# Altium PCB Modulator.PcbDoc (part 1 of 3)
Units mm, origin at the board's own origin, x right, y up, seen from the top; angles counter-clockwise.
Board outline 162.1 x 100.1 mm, 4 copper layers (L1, P2, P5, L6), stack 1.501 mm thick; 138 components, 105 nets, 515 pads, 355 vias.
Unrouted connection lines stored in the file: 38.
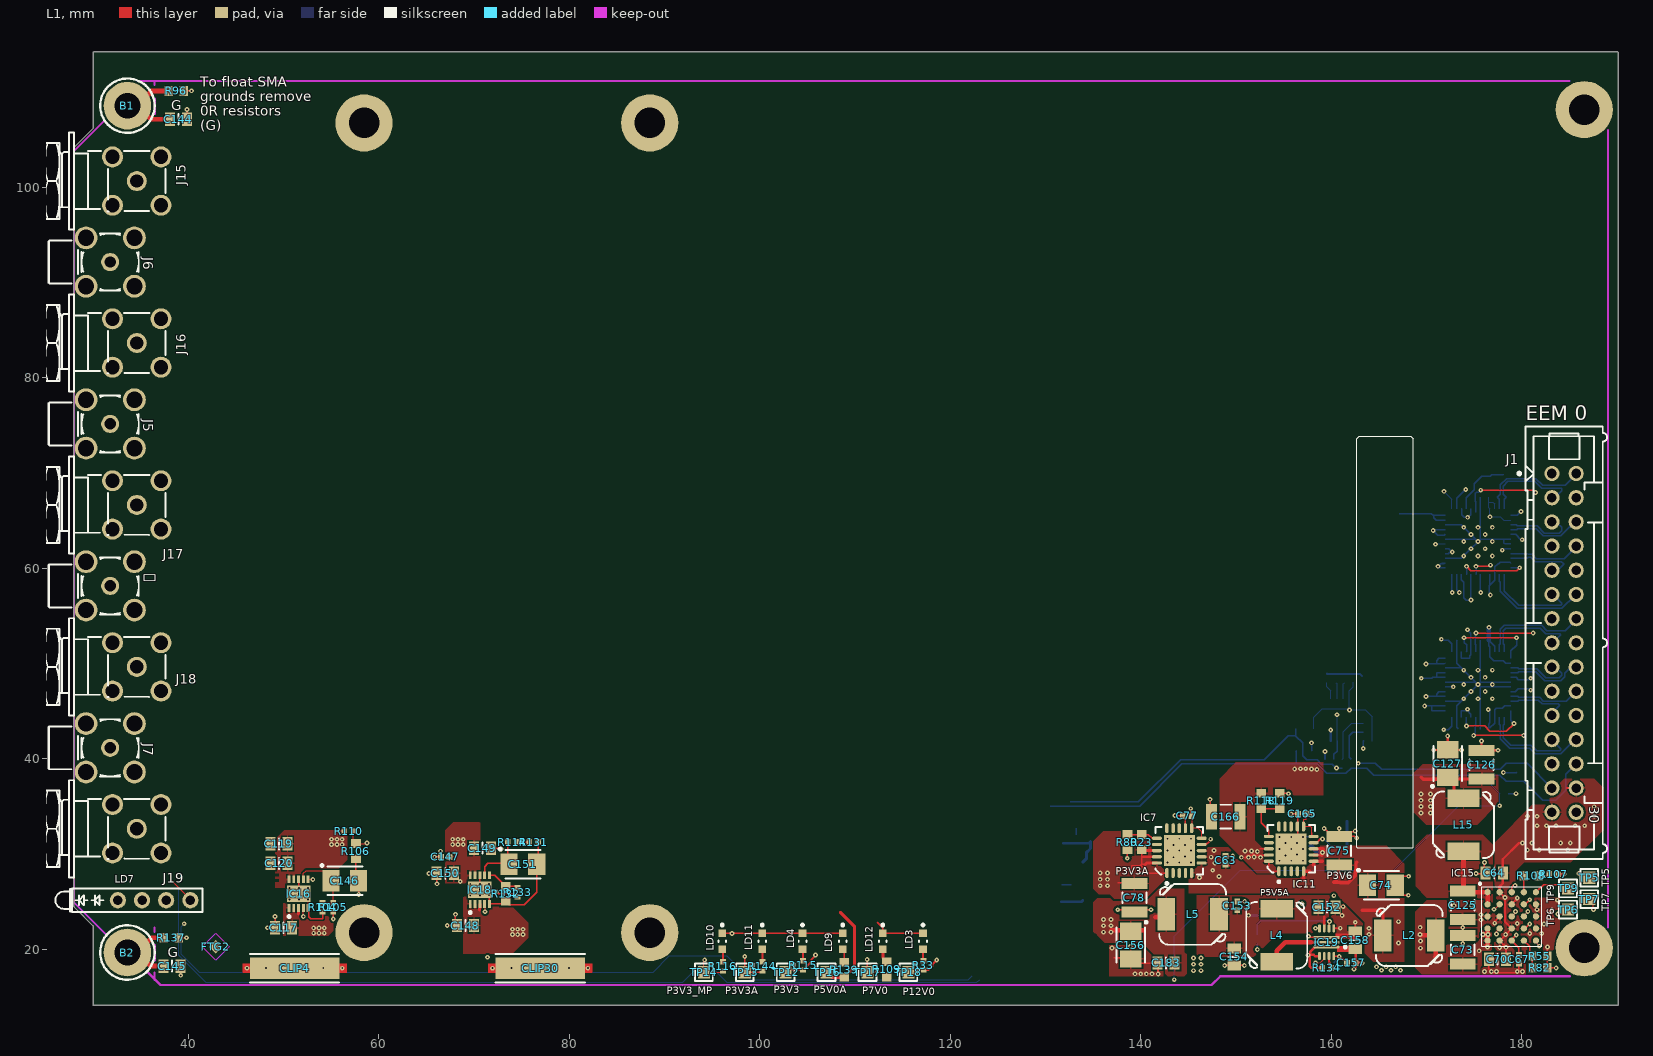
[diagram p0: L1 view]
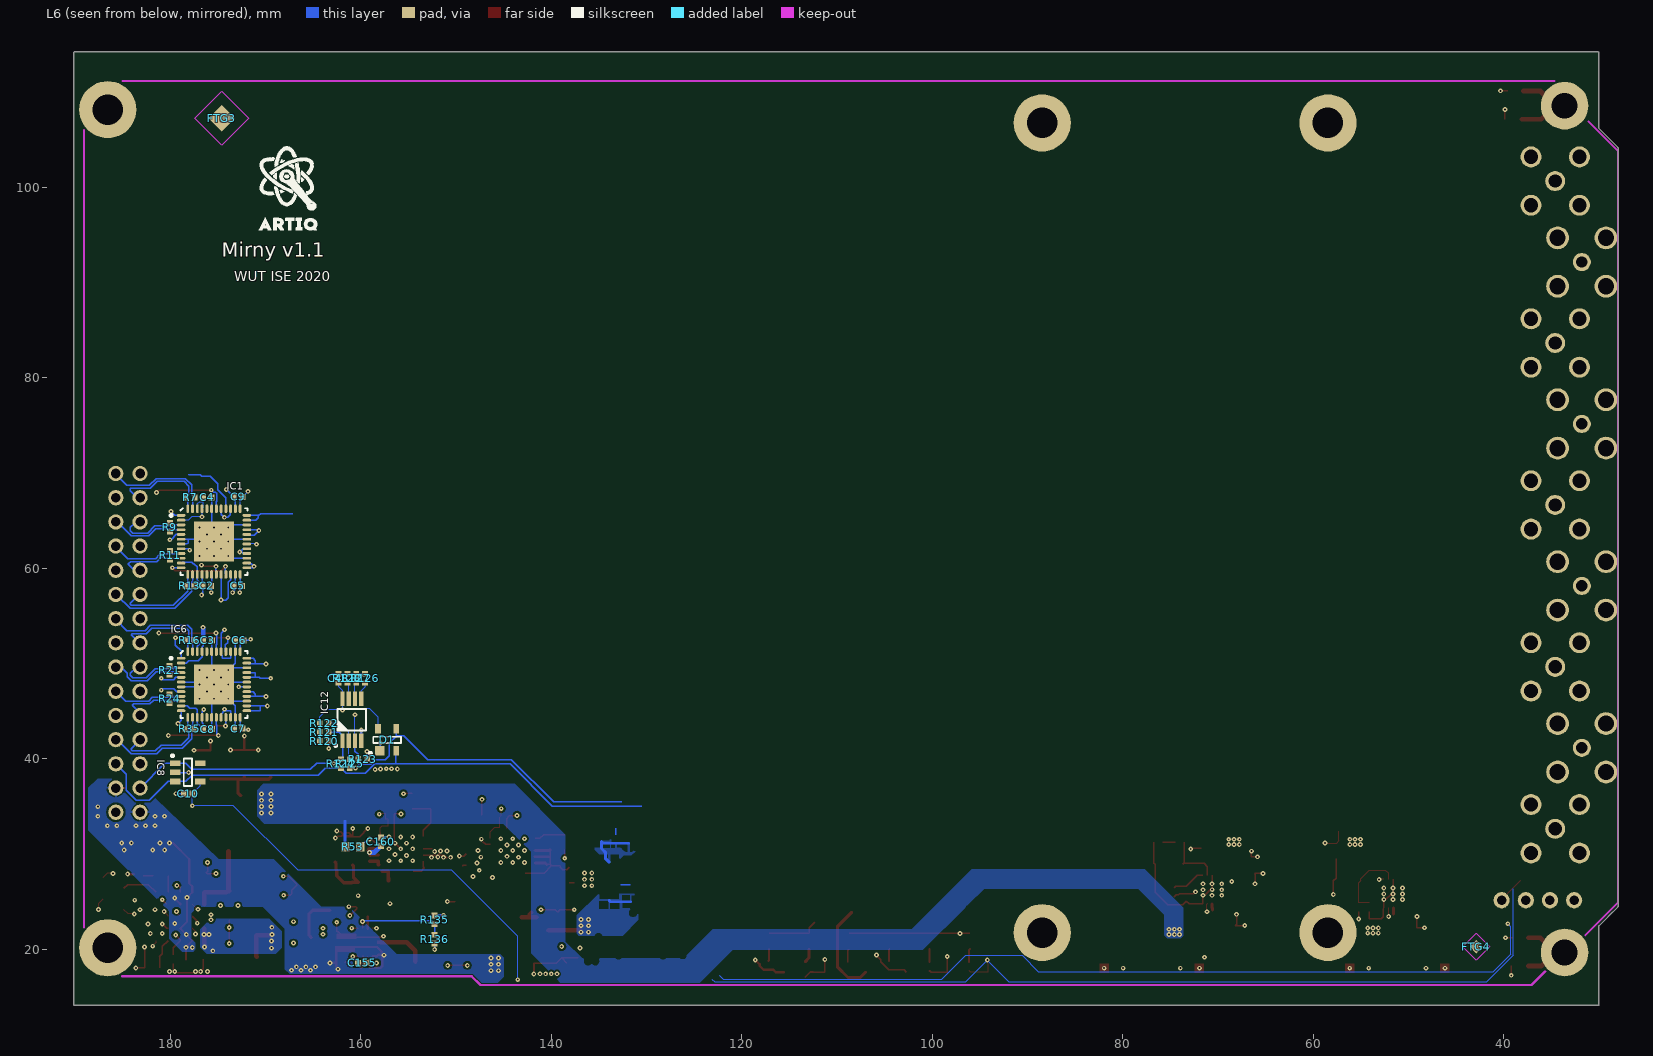
[diagram p1: L6 view, seen from below]
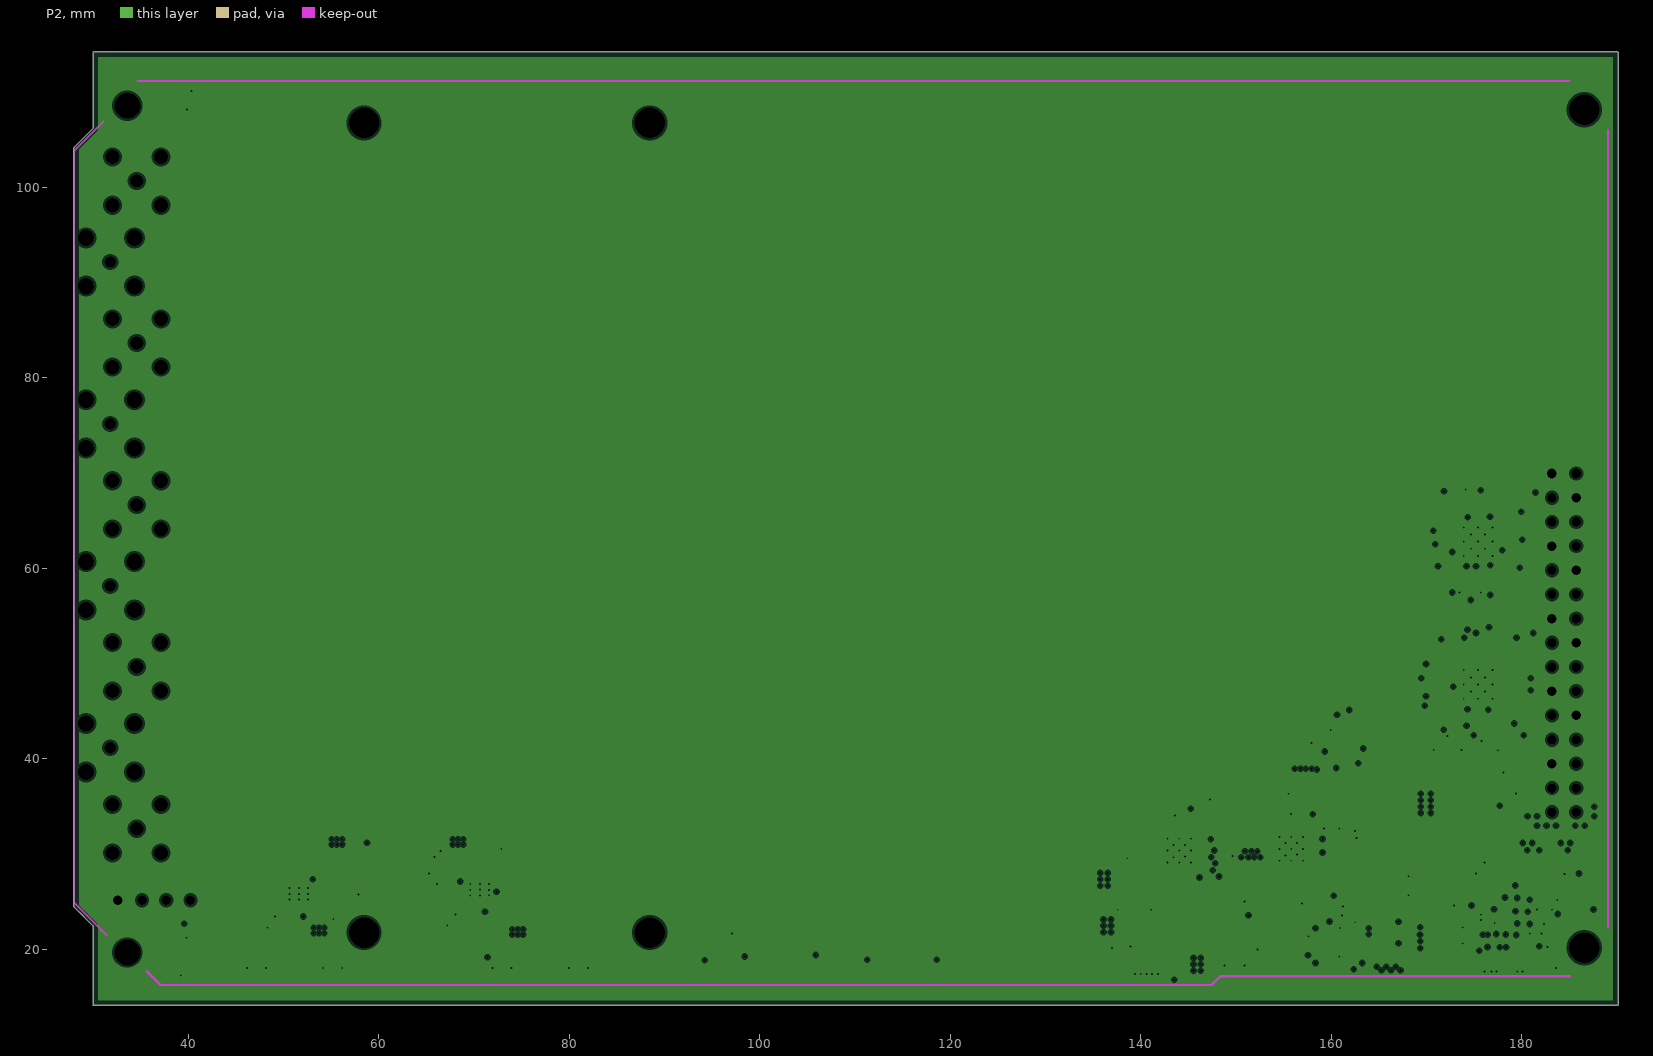
[diagram p2: P2, clearances drawn from the general rule]
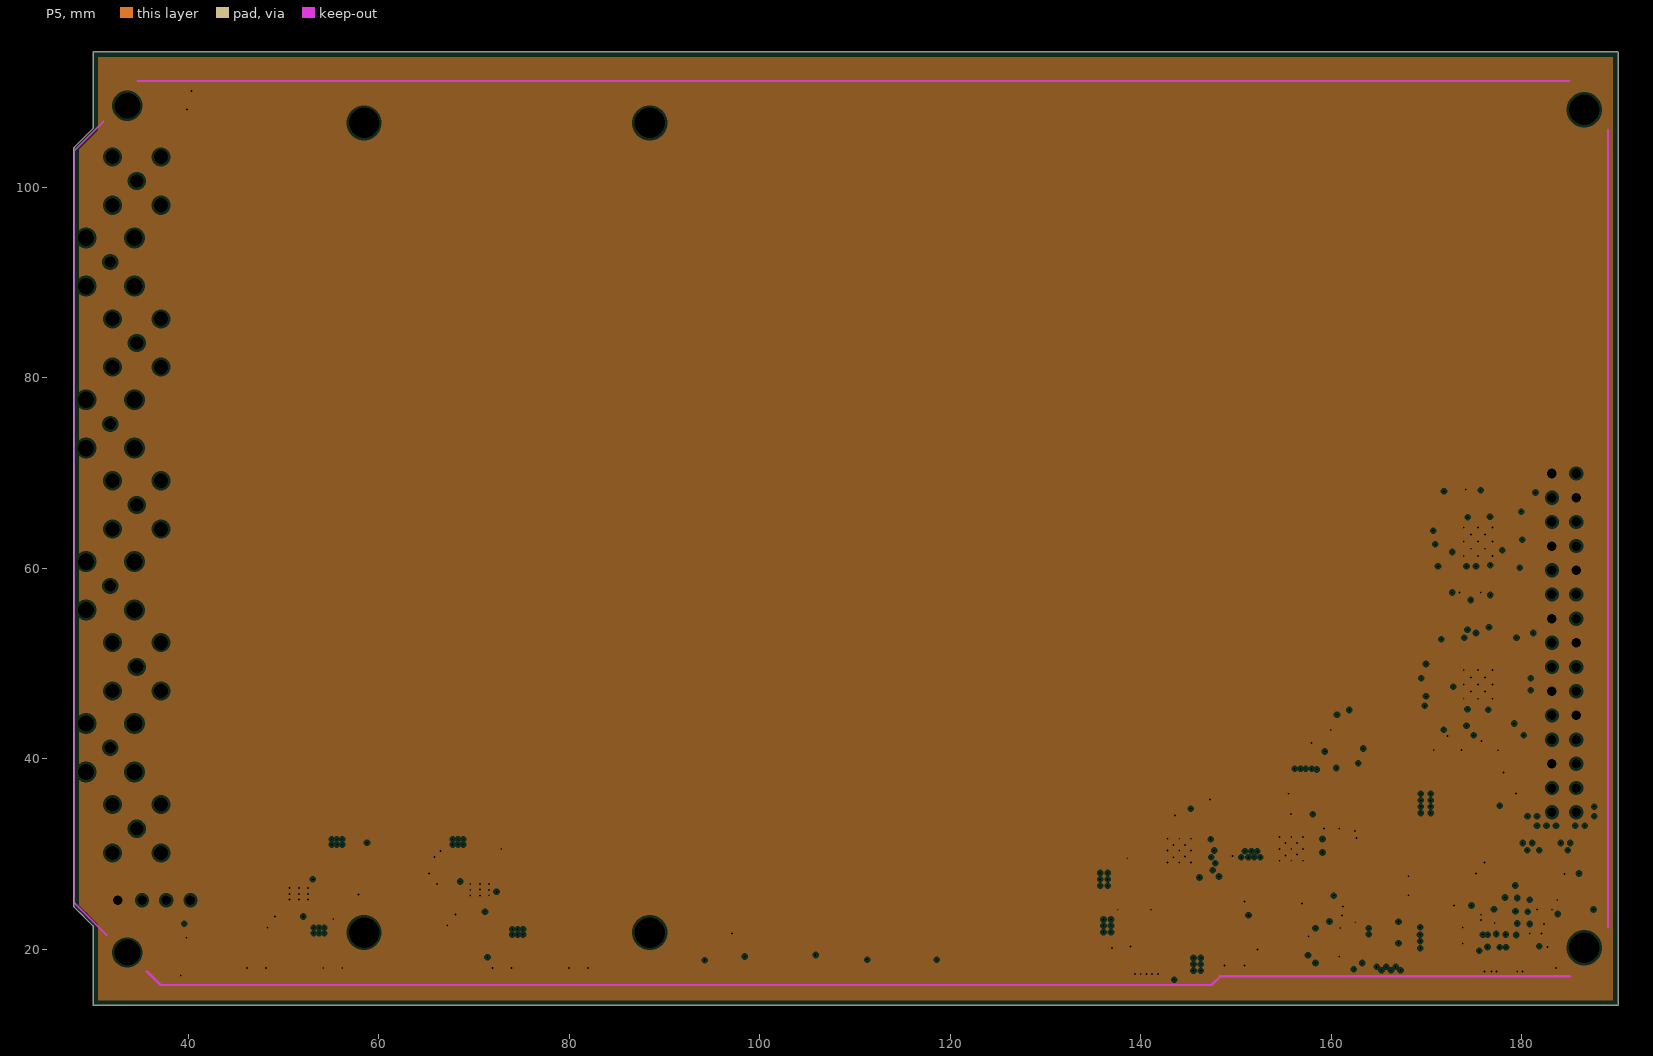
[diagram p3: P5, clearances drawn from the general rule]
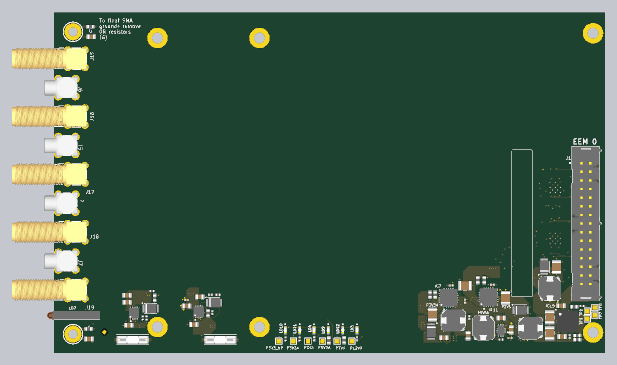
[diagram p5: 3D render of the assembled board from above, using the file's embedded part models]
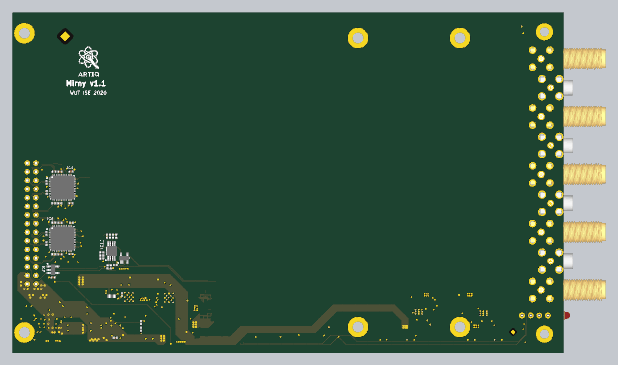
[diagram p6: 3D render of the assembled board from below, using the file's embedded part models]

## Layer stack, top to bottom
Top Solder: solder mask 0.034, Solder Resist, Dk 3.5
L1: signal copper 0.035
Dielectric1: prepreg 0.1803, PP-021, Dk 4.7
P2: plane copper 0.035, net GND
Dielectric 4: prepreg 1, FR4, Dk 4.1
P5: plane copper 0.035, net GND
Dielectric 3: prepreg 0.1803, PP-021, Dk 4.7
L6: signal copper 0.035
Bottom Solder: solder mask 0.034, Solder Resist, Dk 3.5

## Board outline
28.013,24.419 cw(c28.048,24.455) 27.998,24.455 27.998,97.16 27.998,104.135 cw(c28.048,104.135) 28.013,104.171 28.012,104.171 29.998,106.156 29.998,114.135 cw(c30.048,114.135) 30.048,114.186 190.043,114.186 cw(c190.043,114.135) 190.093,114.135 190.093,14.135 cw(c190.043,14.135) 190.043,14.085 30.048,14.085 cw(c30.048,14.135) 29.998,14.135 29.998,22.434 28.012,24.42 29.012,23.42 ccw(c29.048,23.455)

## Design rules (kind name [scope] priority, off if disabled: settings)
AcuteAngle AcuteAngle_GND [InNet('GND')] p1: minimum=5.00000000000000E+0001 checktracksonly=FALSE
AcuteAngle [All] p2: minimum=5.00000000000000E+0001 checktracksonly=FALSE
Clearance Clearance_balance [InNamedPolygon('balancing')            or InNamedPolygon('balancing_top')] p1: gap=0.3 ignorepadtopadclearanceinfootprint=FALSE
Clearance Clearance_1 [InPolygon vs (InDifferentialPairClass('All Differential Pairs'))] p2: gap=0.254 ignorepadtopadclearanceinfootprint=FALSE except(0: Arc-Hole Track-Hole SMDPad-Hole THPad-Hole Via-Hole Fill-Hole Poly-Hole Region-Hole Text-Hole; 0.508: Track-Poly)
Clearance Clearance_KeepOut [OnLayer('Keep-Out Layer') vs NOT ( InComponent('J8') OR InComponent('J11') OR InComponent('J2') OR InComponent('J3') OR InComponent('J4') OR InComponent('J5') OR InComponent('J6') )] p3: gap=0.1 ignorepadtopadclearanceinfootprint=FALSE except(0: Arc-Hole Track-Hole SMDPad-Hole THPad-Hole Via-Hole Fill-Hole Poly-Hole Region-Hole Text-Hole)
Clearance Clearance_50_Ohms_GND_VIA [InNetClass('50_Ohms') vs (IsVia AND InNet('GND')) and not(IsPad)] p4: gap=0.2 ignorepadtopadclearanceinfootprint=FALSE except(0: Arc-Hole Track-Hole SMDPad-Hole THPad-Hole Via-Hole Fill-Hole Poly-Hole Region-Hole Text-Hole)
Clearance Clearance_50_Ohms_GND_Plane [InNetClass('50_Ohms') vs InPolygon] p5: gap=0.5 ignorepadtopadclearanceinfootprint=FALSE except(0: Arc-Hole Track-Hole SMDPad-Hole THPad-Hole Via-Hole Fill-Hole Poly-Hole Region-Hole Text-Hole)
Clearance Clearance_50_Ohms_GND_PADS [InNetClass('50_Ohms') vs InNet('GND')] p6: gap=0.2 ignorepadtopadclearanceinfootprint=FALSE except(0: Arc-Hole Track-Hole SMDPad-Hole THPad-Hole Via-Hole Fill-Hole Poly-Hole Region-Hole Text-Hole)
Clearance Clearance_50_Ohms [InNetClass('50_Ohms')] p7: gap=0.2 ignorepadtopadclearanceinfootprint=FALSE except(0: Arc-Hole Track-Hole SMDPad-Hole THPad-Hole Via-Hole Fill-Hole Poly-Hole Region-Hole Text-Hole)
Clearance Clearance_DiffPair_1 [(InDifferentialPairClass('All Differential Pairs')) vs (InDifferentialPairClass('All Differential Pairs'))] p8 off: gap=0.3 ignorepadtopadclearanceinfootprint=FALSE except(0: Arc-Hole Track-Hole SMDPad-Hole THPad-Hole Via-Hole Fill-Hole Poly-Hole Region-Hole Text-Hole)
Clearance Clearance_Fiducials [InComponentClass('Fiducials')] p9: gap=0 ignorepadtopadclearanceinfootprint=TRUE
Clearance Clearance_SMA [InComponentClass('SMAs') or InComponentClass('FP_LEDs')] p10: gap=0 ignorepadtopadclearanceinfootprint=TRUE
Clearance [Not (OnLayer('Keep-Out Layer'))] p11: gap=0.127 ignorepadtopadclearanceinfootprint=FALSE except(0: Arc-Hole Track-Hole SMDPad-Hole THPad-Hole Via-Hole Fill-Hole Poly-Hole Region-Hole Text-Hole; 0.203: Arc-Poly Track-Poly SMDPad-Poly THPad-Poly Via-Poly Fill-Poly Poly-Poly)
Clearance Clearance_abs [All] p12: gap=0.1 ignorepadtopadclearanceinfootprint=FALSE except(0: Arc-Hole Track-Hole SMDPad-Hole THPad-Hole Via-Hole Fill-Hole Poly-Hole Region-Hole Text-Hole)
ComponentClearance Clearance_TestPoint [(HasFootprint('TPS127'))] p1: gap=0 collisioncheckmode=3 verticalgap=0 showdistances=FALSE
ComponentClearance Clearance_FrontPanel [InComponentClass('Front Panel')] p2: gap=0 collisioncheckmode=3 verticalgap=0 showdistances=FALSE
ComponentClearance Clearance_ERNI [(HasFootprint('ERMET ZD 3-10 CONNECTOR')) vs (HasFootprint('ERMET ZD 3-10 CONNECTOR'))] p3: gap=0 collisioncheckmode=3 verticalgap=0.254 showdistances=FALSE
ComponentClearance Clearance_Radiall_Placement [HasFootprint('Coaxipack2') vs HasFootprint('Coaxipack2')] p4: gap=0 collisioncheckmode=3 verticalgap=0.254 showdistances=FALSE
ComponentClearance [All] p5: gap=0.254 collisioncheckmode=3 verticalgap=0.254 showdistances=FALSE
DiffPairsRouting CLK_DiffPairsRouting [(InDifferentialPairClass('All Differential Pairs'))] p1: maxlimit=0.178 minlimit=0.127 mostfreqgap=0.152 toplayer_minwidth=0.152 toplayer_maxwidth=0.152 toplayer_prefwidth=0.152 bottomlayer_minwidth=0.152 bottomlayer_maxwidth=0.152 bottomlayer_prefwidth=0.152 impedanceprofiledriven=TRUE impedanceprofileid={C5AA11C3-B91C-49ED-8D09-5B71503F6C61} impedanceprofilevalue=100.000000 maxuncoupledlength=10
FabricationTestPointUsage TestPointUsage [All] p1: valid=0 allowmultiple=FALSE
FabricationTestpoint Testpoint [(IsPad And (OnTopLayer Or OnBottomLayer))] p1: side=3 testpointundercomponent=TRUE minsize=1.016 maxsize=2.54 preferedsize=1.524 minholesize=0 maxholesize=1.016 preferedholesize=0.813 testpointgrid=0.025 allowsidetop=TRUE allowsidebottom=TRUE usegrid=TRUE gridtolerance=0
Height BottomHeight [All] p1: minheight=0 maxheight=20 prefheight=10
Height TopHeight [OnLayer('Top Layer (LO)')] p2: minheight=0 maxheight=2.5 prefheight=1
HoleSize [All] p1: absolutevalues=TRUE maxlimit=5 minlimit=0.2 maxpercent=80.000 minpercent=20.000
HoleToHoleClearance [All] p1: gap=0.2 allowstackedmicrovias=TRUE
MatchedLengths "CLK IC13" [InDifferentialPairClass('CLK_IC13')] p1: tolerance=1.27 checknetsindiffpair=FALSE checkdiffpairvsdiffpair=TRUE checkxsignals=TRUE checkothers=TRUE
MinimumAnnularRing MinimumAnnularRing_Blind [(InNetClass('50_Ohms') OR InDifferentialPairClass('All Differential Pairs'))] p1: minimumring=0.1
MinimumAnnularRing [All] p2: minimumring=0.15
MinimumSolderMaskSliver [All] p1: minsoldermaskwidth=0.2
PlaneClearance [All] p1: clearance=0.25
PlaneConnect PlaneConnect_pad [InPadClass('All Pads')] p1: planeconnectstyle=Relief reliefexpansion=0.508 reliefentries=4 reliefconductorwidth=0.254 reliefairgap=0.254
PlaneConnect [All] p2: planeconnectstyle=Direct reliefexpansion=0.508 reliefentries=4 reliefconductorwidth=0.254 reliefairgap=0.254
PolygonConnect PolygonConnect_pad [IsPad] p1: connectstyle=Relief reliefconductorwidth=0.2 reliefentries=4 polygonreliefangle="90 Angle" airgapwidth=0.152
PolygonConnect [All] p2: connectstyle=Direct reliefconductorwidth=0.254 reliefentries=4 polygonreliefangle="90 Angle" airgapwidth=0.254
RoomDefinition Modulator [InComponentClass('Modulator')] p1: confinementstyle=ConfineIn formatcopy=TRUE lockcomponents=FALSE outline 0,0 50.8,0 50.8,25.4 0,25.4
RoomDefinition U_Supply_Modulator [InComponentClass('U_Supply_Modulator')] p2 off: confinementstyle=ConfineIn formatcopy=TRUE lockcomponents=FALSE outline 120.617,25.978 94.044,25.978 94.044,42.233 120.617,42.233
RoomDefinition U_LVDS_IFCA [InComponentClass('U_LVDS_IFCA')] p3 off: confinementstyle=ConfineIn formatcopy=TRUE lockcomponents=FALSE outline 164.78,23.94 189.048,23.94 189.048,76.181 164.78,76.181
RoutingVias [All] p1: holewidth=0.2 width=0.5 viastyle="Through Hole" minholewidth=0.2 minwidth=0.5 maxholewidth=0.5 maxwidth=1
SMDNeckDown [All] p1: percent=100.000
SMDToCorner [All] p1: distance=78740
SMDToPlane [All] p1: distance=0
SilkToSilkClearance [All] p1: silktosilkclearance=0
SilkToSolderMaskClearance SilkscreenOverComponentPads [IsPad] p1: minsilkscreentomaskgap=0.05 clearancetoexposedcopper=TRUE
SolderMaskExpansion SolderMaskExpansion_GND_VIA [IsVia AND InNet('GND')] p1: expansion=-0.1 istentingtop=FALSE
SolderMaskExpansion [All] p2: expansion=0.05 istentingtop=FALSE
Width 50_Ohm_Lines [InNetClass('50_Ohms')] p1: maxlimit=0.333 minlimit=0.24 preferedwidth=0.279 toplayer_prefwidth=0.278 bottomlayer_minwidth=0.279 impedanceprofiledriven=TRUE impedanceprofileid={03AB9ABB-85C4-48E2-9EB1-A1AAAEFC589C} impedanceprofilevalue=50.000000 minimp=45.000000 maximp=55.000000 favimp=50.000000
18 further rules are at their usual default settings.

## Classes and differential pairs
component class U_Supply_Modulator: C48 C63 C64 C67 C70 C73 C74 C75 C77 C78 C117 C119 C120 C125 C126 C127 C146 C147 C148 C149 C150 C151 C152 C153 C154 C155 C156 C157 C158 C160 C165 C166 C183 IC7 IC11 IC12 IC15 IC16 IC18 IC19 L2 L4 L5 L15 LD3 LD4 LD7 LD9 LD10 LD11 LD12 R23 R33 R53 R55 R80 R82 R104 R105 R106 R107 R108 R109 R110 R114 R115 R116 R118 R119 R120 R121 R122 R123 R124 R125 R126 R127 R128 R131 R132 R133 R134 R135 R136 R139 R144 TP5 TP6 TP7 TP9 TP12 TP13 TP14 TP16 TP17 TP18
component class U_LVDS_IFCA: C2 C3 C4 C5 C6 C7 C8 C9 C10 D1 IC1 IC6 IC8 J1 R7 R9 R11 R13 R16 R21 R24 R35
component class Modulator: B1 B2 C144 C145 CLIP4 CLIP30 FTG2 FTG3 FTG4 R96 R137
differential pair LVDS7: +LVDS7_P -LVDS7_N
differential pair LVDS6: +LVDS6_P -LVDS6_N
differential pair LVDS5: +LVDS5_P -LVDS5_N
differential pair LVDS4: +LVDS4_P -LVDS4_N
differential pair LVDS3: +LVDS3_P -LVDS3_N
differential pair LVDS2: +LVDS2_P -LVDS2_N
differential pair LVDS1: +LVDS1_P -LVDS1_N
differential pair LVDS0: +LVDS0_P -LVDS0_N

## Components (designator, comment, footprint, x,y, rotation, side; value= is the part's Value field where it differs from the comment)
 "MCX" AMPHENOL_919-383J-51A 31.798,58.135 r180 top (schematic designator J2)
B1 "Plated Hole" MTG270_500 33.604,108.547 r0 top
B2 "Plated Hole" MTG270_500 33.604,19.647 r0 top
C2 "100nF" CAPC1005X55N 176.148,58.135 r0 bottom
C3 "100nF" CAPC1005X55N 176.073,52.41 r0 bottom
C4 "100nF" CAPC1005X55N 176.098,67.435 r0 bottom
C5 "100nF" CAPC1005X55N 172.898,58.135 r180 bottom
C6 "100nF" CAPC1005X55N 172.748,52.41 r180 bottom
C7 "100nF" CAPC1005X55N 172.848,43.16 r180 bottom
C8 "100nF" CAPC1005X55N 176.073,43.11 r0 bottom
C9 "100nF" CAPC1005X55N 172.873,67.485 r180 bottom
C10 "100nF" CAPC1005X55N 178.105,36.322 r180 bottom
C48 "100nF" CAPC1005X55N 162.322,48.453 r270 bottom
C63 "1uF" CAPC1005X55N 148.907,29.327 r90 top
C64 "22uF" CAPC2012X135N 177.098,27.994 r0 top
C67 "100nF" CAPC1005X55N 179.688,18.938 r90 top
C70 "22uF" CAPC2012X135N 177.438,18.938 r0 top
C73 "47uF" CAPC3225X270N 173.79,19.924 r270 top
C74 "22uF" CAPMP3528X210N 165.259,26.694 r0 top
C75 "47uF" CAPC3225X270N 160.826,30.322 r270 top
C77 "1uF" CAPC1005X55N 144.848,33.983 r0 top
C78 "47uF" CAPC3225X270N 139.327,25.396 r90 top
C117 "22uF" CAPC2012X135N 50.007,22.25 r180 top
C119 "22uF" CAPC2012X135N 49.514,31.055 r180 top
C120 "22uF" CAPC2012X135N 49.525,29.008 r180 top
C125 "47uF" CAPC3225X270N 173.79,24.603 r90 top
C126 "47uF" CAPC3225X270N 175.768,39.357 r270 top
C127 "22uF" CAPMP3528X210N 172.212,39.482 r90 top
C144 "Undefined" CAPC2012X135N 38.967,107.119 r0 top
C145 "Undefined" CAPC2012X135N 38.302,18.219 r0 top
C146 "22uF" CAPMP3528X210N 56.434,27.181 r0 top
C147 "100nF" CAPC1005X55N 66.975,29.693 r0 top
C148 "22uF" CAPC2012X135N 69.09,22.479 r180 top
C149 "22uF" CAPC2012X135N 70.875,30.601 r0 top
C150 "22uF" CAPC2012X135N 66.975,27.953 r180 top
C151 "22uF" CAPMP3528X210N 75.129,28.908 r0 top
C152 "22uF" CAPC2012X135N 159.534,24.392 r180 top
C153 "100nF" CAPC1005X55N 150.121,24.558 r270 top
C154 "22uF" CAPC2012X135N 149.794,19.19 r90 top
C155 "100nF" CAPC1005X55N 159.819,18.574 r0 bottom
C156 "22uF" CAPMP3528X210N 138.955,20.422 r270 top
C157 "100nF" CAPC1005X55N 162.112,18.552 r0 top
C158 "22uF" CAPC2012X135N 162.5,20.933 r270 top
C160 "1uF" CAPC1005X55N 157.871,31.275 r90 bottom
C165 "1uF" CAPC1005X55N 156.938,34.188 r0 top
C166 "47uF" CAPC3225X270N 148.907,33.905 r0 top
C183 "22uF" CAPC2012X135N 142.653,18.552 r0 top
CLIP4 "S1411-46R" CLIP_HOLLAND-SHIELDING_LC 51.149,17.997 r180 top
CLIP30 "S1411-46R" CLIP_HOLLAND-SHIELDING_LC 76.93,17.997 r180 top
D1 "PRTR5V0U2X" SOT190P230X110-4N 157.226,41.974 r90 bottom
FTG2 "Use only in PCB" FIDUCIAL_TOP_S100-200 42.862,20.256 r180 top locked
FTG3 "Use only in PCB" FIDUCIAL_TOP_S200-400 174.577,107.221 r180 bottom locked
FTG4 "Use only in PCB" FIDUCIAL_TOP_S100-200 42.862,20.256 r90 bottom locked
IC1 "SN65MLVD040RGZT" QFN50P700X700X100-49N-S420 175.398,62.785 r180 bottom
IC6 "SN65MLVD040RGZT" QFN50P700X700X100-49N-S420 175.398,47.785 r180 bottom
IC7 "TPS74901RGWT" QFN65P500X500X100-21N-S325 144.035,30.342 r90 top
IC8 "24AA02E48T-I/OT" SOT95P280X145-5N 178.148,38.56 r180 bottom
IC11 "TPS74901RGWT" QFN65P500X500X100-21N-S325 155.785,30.527 r90 top
IC12 "LM75AIMM/NOPB" SOP65P490X109-8N 160.921,44.089 r90 bottom
IC15 "LTM4622AEV#PBF" LGA25C127P5X5_625X625X190 178.938,23.438 r0 top
IC16 "LT3045EDD#PBF" SON50P300X300X80-11N-R175X248 51.574,25.822 r90 top
IC18 "LT3045EDD#PBF" SON50P300X300X80-11N-R175X248 70.604,26.244 r90 top
IC19 "TPS62148RGX" TEXAS_RGX0011A 159.506,20.724 r180 top
J1 "" 3M_N2530-6002RB 184.432,52.154 r270 top locked
J5 "MCX" AMPHENOL_919-383J-51A 31.798,75.135 r180 top
J6 "MCX" AMPHENOL_919-383J-51A 31.798,92.135 r180 top (schematic designator J5)
J7 "MCX" AMPHENOL_919-383J-51A 31.798,41.135 r180 top (schematic designator J5)
J15 "SMA" DELOCK_65848 34.588,100.635 r180 top
J16 "SMA" DELOCK_65848 34.588,83.635 r180 top
J17 "SMA" DELOCK_65848 34.588,66.635 r180 top
J18 "SMA" DELOCK_65848 34.588,49.635 r180 top
J19 "SMA" DELOCK_65848 34.588,32.635 r180 top (schematic designator J17)
L2 "1.5uH" IND_TDK_SPM6530 168.188,21.438 r180 top
L4 "1.5uH" IND_TDK_SPM6530 154.265,21.463 r90 top
L5 "1.5uH" IND_TDK_SPM6530 145.435,23.66 r180 top
L15 "1.5uH" IND_TDK_SPM6530 173.871,33.058 r90 top
LD3 "Green" LED_KINGBRIGHT_KPH-1608CGCKr 117.128,20.832 r270 top
LD4 "Green" LED_KINGBRIGHT_KPH-1608CGCKr 104.48,20.832 r270 top
LD7 "Red/Green" LED_DIALIGHT_571-0112F 32.598,25.135 r0 top locked
LD9 "Green" LED_KINGBRIGHT_KPH-1608CGCKr 108.696,20.832 r270 top
LD10 "Green" LED_KINGBRIGHT_KPH-1608CGCKr 96.048,20.832 r270 top
LD11 "Green" LED_KINGBRIGHT_KPH-1608CGCKr 100.264,20.832 r270 top
LD12 "Green" LED_KINGBRIGHT_KPH-1608CGCKr 112.912,20.832 r270 top
R7 "100" RESC1005X40N 177.898,67.435 r0 bottom
R9 "100" RESC1005X40N 180.023,64.285 r270 bottom
R11 "100" RESC1005X40N 179.998,61.335 r270 bottom
R13 "100" RESC1005X40N 177.948,58.135 r180 bottom
R16 "100" RESC1005X40N 177.923,52.435 r0 bottom
R21 "100" RESC1005X40N 180.048,49.285 r270 bottom
R23 "4k7" RESC1608X55N 140.098,31.233 r270 top
R24 "100" RESC1005X40N 180.048,46.285 r270 bottom
R33 "10k" RESC1005X40N 117.182,18.313 r90 top
R35 "100" RESC1005X40N 177.94,43.131 r180 bottom
R53 "5k6" RESC1608X55N 160.826,30.769 r0 bottom
R55 "24k" RESC1608X55N 181.885,19.255 r0 top
R80 "1k5" RESC1608X55N 138.598,31.233 r90 top
R82 "24k" RESC1608X55N 181.885,18.034 r0 top
R96 "0" RESC1608X55N 38.738,110.091 r0 top
R104 "100k" RESC1005X40N 54.101,24.391 r90 top
R105 "100k" RESC1005X40N 55.211,24.403 r90 top
R106 "1k3" RESC1608X55N 57.602,30.287 r90 top
R107 "150" RESC1005X40N 183.325,27.877 r0 top
R108 "5k1" RESC1608X55N 180.985,27.689 r0 top
R109 "5k6" RESC1608X55N 113.325,17.878 r270 top
R110 "18k" RESC1005X40N 56.863,32.373 r180 top
R114 "68k" RESC1005X40N 74.022,31.238 r180 top
R115 "1k2" RESC1005X40N 104.547,18.289 r90 top
R116 "1k2" RESC1005X40N 96.117,18.195 r90 top
R118 "4k7" RESC1608X55N 152.654,35.56 r90 top
R119 "1k5" RESC1608X55N 154.559,35.56 r270 top
R120 "10k" RESC1005X40N 163.821,41.843 r0 bottom
R121 "10k" RESC1005X40N 163.821,42.777 r0 bottom
R122 "10k" RESC1005X40N 163.821,43.711 r0 bottom
R123 "0" RESC1005X40N 159.793,39.942 r180 bottom
R124 "0" RESC1005X40N 162.065,39.484 r90 bottom
R125 "0" RESC1005X40N 161.148,39.484 r90 bottom
R126 "0" RESC1005X40N 159.534,48.453 r270 bottom
R127 "0" RESC1005X40N 160.463,48.453 r270 bottom
R128 "0" RESC1005X40N 161.393,48.453 r270 bottom
R131 "2k" RESC1005X40N 76.245,31.238 r180 top
R132 "3k3" RESC1608X55N 73.3,25.822 r90 top
R133 "68k" RESC1005X40N 74.575,25.978 r270 top
R134 "47k" RESC1005X40N 159.503,18.035 r180 top
R135 "47k" RESC1005X40N 152.229,23.062 r90 bottom
R136 "5k6" RESC1005X40N 152.229,21.062 r90 bottom
R137 "0" RESC1608X55N 38.202,21.191 r0 top
R139 "2k2" RESC1608X55N 108.841,17.834 r270 top
R144 "1k2" RESC1005X40N 100.264,18.195 r90 top
TP5 "Test Point" TPS127 187.071,27.495 r0 top
TP6 "Test Point" TPS127 184.849,24.146 r0 top
TP7 "Test Point" TPS127 187.071,25.245 r0 top
TP9 "Test Point" TPS127 184.849,26.381 r0 top
TP12 "Test Point" TPS127 102.706,17.577 r90 top
TP13 "Test Point" TPS127 98.411,17.577 r90 top
TP14 "Test Point" TPS127 94.117,17.577 r90 top
TP16 "Test Point" TPS127 107.001,17.577 r270 top
TP17 "Test Point" TPS127 111.296,17.577 r90 top
TP18 "Test Point" TPS127 115.59,17.577 r90 top

## Footprints (in the part's own frame and the unit in brackets; to place one, negate y for a bottom-side part, rotate by r counter-clockwise, add the part's x,y. Pads: shape width x height; smd on the part's side, far side on the other; paste and mask are expansions set on the pad)
3M_N2530-6002RB [mm] "30 Contacts - Straight .100\" x .100\" Low Profile Four-Wall Header"
  round 1.6 hole 1: 1(-17.78,-1.27) 2(-17.78,1.27) 3(-15.24,-1.27) 4(-15.24,1.27) 5(-12.7,-1.27) 6(-12.7,1.27) 7(-10.16,-1.27) 8(-10.16,1.27) 9(-7.62,-1.27) 10(-7.62,1.27) 11(-5.08,-1.27) 12(-5.08,1.27) 13(-2.54,-1.27) 14(-2.54,1.27) 15(0,-1.27) 16(0,1.27) 17(2.54,-1.27) 18(2.54,1.27) 19(5.08,-1.27) 20(5.08,1.27) 21(7.62,-1.27) 22(7.62,1.27) 23(10.16,-1.27) 24(10.16,1.27) 25(12.7,-1.27) 26(12.7,1.27) 27(15.24,-1.27) 28(15.24,1.27) 29(17.78,-1.27) 30(17.78,1.27)
  silkscreen extent -22.71,-4.85 22.71,4.52, body extent -22.71,-4.11 22.71,4.52, height 9.91
AMPHENOL_919-383J-51A [mm] "50 Ohm, RF Connector, MCX Right Angle PCB Receptacle Jack"
  round 1.9 hole 1.2: 1(0,0)
  round 2.4 hole 1.7: 2(-2.54,2.54) 2(-2.54,-2.54) 2(2.54,2.54) 2(2.54,-2.54)
  silkscreen extent -3,-3 6.5,3, body extent -3,-3 6.5,3, height 6
CAPC1005X55N [mm] "Chip Capacitor, Body 1.0x0.55mm, IPC Medium Density"
  rect 0.62x0.62 smd: 1(-0.45,0) 2(0.45,0)
  body extent -0.52,-0.27 0.53,0.28, height 0.55
CAPC2012X135N [mm] "Chip Capacitor, Body 2.0x1.25mm, IPC Medium Density"
  rect 1.05x1.4 smd: 1(-0.9,0) 2(0.9,0)
  silkscreen extent 0,-0.58 0,0.58, body extent -1.05,-0.67 1.05,0.68, height 1.25
CAPC3225X270N [mm] "Chip Capacitor, Body 3.2x2.5mm, IPC Medium Density"
  rect 1.15x2.7 smd: 1(-1.5,0) 2(1.5,0)
  silkscreen extent -0.55,-1.25 0.55,1.25, body extent -1.7,-1.35 1.7,1.35, height 2.7
CAPMP3528X210N [mm] "Capacitor, Polarized, Molded  Body 3.5x2.8mm, IPC Medium Density"
  rect 1.8x2.25 smd: 1(-1.45,0) 2(1.45,0)
  silkscreen extent -2.52,-1.5 1.85,1.72, body extent -1.85,-1.5 1.85,1.5, height 2.1
CLIP_HOLLAND-SHIELDING_LC [mm] "Surface Mount Clip for PCB Screening Covers"
  rect 9.4x2.3 smd: 1(0,0)
  silkscreen extent -4.7,-1.5 4.7,1.5, body extent -4.4,-1.15 4.4,1.15, height 3.5
DELOCK_65848 [mm] "50 Ohm Through Hole SMA Right Angle PCB Jack"
  round 2.1 hole 1.4: 1(0,0)
  round 2.2 hole 1.5: 2(-2.54,2.54) 2(-2.54,-2.54) 2(2.54,2.54) 2(2.54,-2.54)
  silkscreen extent -3,-5.1 19.1,5.1, body extent -3.04,-3.17 18.96,3.09, height 9.15
FIDUCIAL_TOP_S100-200 [mm] "Square Fiducial Target, Top Layer, 1.0mm, Top Solder 2.0mm, Keepout =2.0mm"
  rect 1x1 smd rot 45 paste-0.51 mask+0.5: 1(0,0)
  L1 keep-out region: 1.414,0 0,-1.414 -1.414,0 0,1.414
FIDUCIAL_TOP_S200-400 [mm] "Square Fiducial Target, Top Layer, 2.0mm, Top Solder 4.0mm, Keepout =4.0mm"
  rect 2x2 smd rot 45 paste-0.9 mask+1: 1(0,0)
  L1 keep-out region: -2.839,0.011 -0.011,2.839 2.818,0.011 -0.011,-2.818
IND_TDK_SPM6530 [mm] "SMD Inductor, 7.1mm L X 6.5mm W X 3mm H, TDK SPM6530 Series"
  rect 1.85x3.4 smd: 1(-2.775,0) 2(2.775,0)
  silkscreen extent -3.5,-3.2 3.5,3.2, body extent -3.6,-3.2 3.6,3.2, height 3.1
LED_DIALIGHT_571-0112F [mm] "2x 2mm LED (Top: Red, Bot: Green) PCB Edge Mounting (Without positioning pins) DIALIGHT 571 Serie"
  round 1.7 hole 1: 1(0,0) 2(2.54,0) 3(5.08,0) 4(7.62,0)
  silkscreen extent -6.55,-1.24 8.89,1.24, body extent -6.55,-1.24 8.89,1.24, height 8.61
LED_KINGBRIGHT_KPH-1608CGCKr [mm] "SMT Green LED, Case 0603, Body L 1.6 x W 0.8mm H 0.65mm"
  rect 0.8x0.8 smd: 1(-0.825,0) 2(0.825,0)
  silkscreen extent -1.82,-0.4 0.08,0.4, body extent -0.8,-0.4 0.8,0.4, height 0.65
LGA25C127P5X5_625X625X190 [mm] "LGA, 25-Leads, Body 6.25x6.25mmx1.90mm, Pitch 1.27mm"
  round 0.66 smd: A1(-2.54,2.54) A2(-1.27,2.54) A3(0,2.54) A4(1.27,2.54) A5(2.54,2.54) B1(-2.54,1.27) B2(-1.27,1.27) B3(0,1.27) B4(1.27,1.27) B5(2.54,1.27) C1(-2.54,0) C2(-1.27,0) C3(0,0) C4(1.27,0) C5(2.54,0) D1(-2.54,-1.27) D2(-1.27,-1.27) D3(0,-1.27) D4(1.27,-1.27) D5(2.54,-1.27) E1(-2.54,-2.54) E2(-1.27,-2.54) E3(0,-2.54) E4(1.27,-2.54) E5(2.54,-2.54)
  silkscreen extent -3.42,-3.13 3.13,3.51, body extent -3.13,-3.13 3.13,3.13, height 1.9
MTG270_500 [mm] "Plated Through Hole: Hole Dia.=2.7mm Pad Dia.=5.0mm"
  round 5 hole 2.7: 1(0,0)
QFN50P700X700X100-49N-S420 [mm] "QFN, 0.50mm Pitch, Square; 48 Pin, 7.00mm L X 7.00mm W X 1mm H body (W/Thermal Tab 4.2mm X 4.2mm), IPC Medium Density"
  oval 0.9x0.3 smd: 1(-3.45,2.75) 2(-3.45,2.25) 3(-3.45,1.75) 4(-3.45,1.25) 5(-3.45,0.75) 6(-3.45,0.25) 7(-3.45,-0.25) 8(-3.45,-0.75) 9(-3.45,-1.25) 10(-3.45,-1.75) 11(-3.45,-2.25) 12(-3.45,-2.75) 25(3.45,-2.75) 26(3.45,-2.25) 27(3.45,-1.75) 28(3.45,-1.25) 29(3.45,-0.75) 30(3.45,-0.25) 31(3.45,0.25) 32(3.45,0.75) 33(3.45,1.25) 34(3.45,1.75) 35(3.45,2.25) 36(3.45,2.75)
  oval 0.3x0.9 smd: 13(-2.75,-3.45) 14(-2.25,-3.45) 15(-1.75,-3.45) 16(-1.25,-3.45) 17(-0.75,-3.45) 18(-0.25,-3.45) 19(0.25,-3.45) 20(0.75,-3.45) 21(1.25,-3.45) 22(1.75,-3.45) 23(2.25,-3.45) 24(2.75,-3.45) 37(2.75,3.45) 38(2.25,3.45) 39(1.75,3.45) 40(1.25,3.45) 41(0.75,3.45) 42(0.25,3.45) 43(-0.25,3.45) 44(-0.75,3.45) 45(-1.25,3.45) 46(-1.75,3.45) 47(-2.25,3.45) 48(-2.75,3.45)
  rect 4.2x4.2 smd: 49(0,0)
  silkscreen extent -4.63,-3.5 3.5,3.5, body extent -3.5,-3.5 3.5,3.5, height 1
QFN65P500X500X100-21N-S325 [mm] "QFN, 0.65mm pitch,square; 20 pin, 5mm X 5mm X 1mm H body (w/thermal tab 3.25 X 3.25mm),  IPC Medium Density"
  oval 1.05x0.35 smd: 1(-2.35,1.3) 2(-2.35,0.65) 3(-2.35,0) 4(-2.35,-0.65) 5(-2.35,-1.3) 11(2.35,-1.3) 12(2.35,-0.65) 13(2.35,0) 14(2.35,0.65) 15(2.35,1.3)
  oval 0.35x1.05 smd: 6(-1.3,-2.35) 7(-0.65,-2.35) 8(0,-2.35) 9(0.65,-2.35) 10(1.3,-2.35) 16(1.3,2.35) 17(0.65,2.35) 18(0,2.35) 19(-0.65,2.35) 20(-1.3,2.35)
  rect 3.25x3.25 smd: 21(0,0)
  silkscreen extent -3.57,-2.5 2.5,2.5, body extent -2.57,-2.57 2.58,2.58, height 1
RESC1005X40N [mm] "Chip Resistor, EIA 0402, Metric 1005, Body 1.0x0.5mm, IPC Medium Density"
  rect 0.58x0.62 smd: 1(-0.47,0) 2(0.47,0)
  body extent -0.52,-0.27 0.53,0.28, height 0.4
RESC1608X55N [mm] "Chip Resistor, EIA 0603, Metric 1608, Body 1.6x0.8mm, IPC Medium Density"
  rect 0.9x1 smd: 1(-0.8,0) 2(0.8,0)
  body extent -0.87,-0.47 0.88,0.48, height 0.55
SON50P300X300X80-11N-R175X248 [mm] "SON, 0.50mm Pitch; 10-pin, 3.00mm W  X 3.00mm L X 0.80mm H Body, (w/thermal tab 1.75 X 2.48 mm), IPC Medium Density"
  rect 0.8x0.3 smd: 1(-1.5,1) 2(-1.5,0.5) 3(-1.5,0) 4(-1.5,-0.5) 5(-1.5,-1) 6(1.5,-1) 7(1.5,-0.5) 8(1.5,0) 9(1.5,0.5) 10(1.5,1)
  rect 1.75x2.48 smd: 11(0,0)
  silkscreen extent -2.52,0.87 -2.28,1.12, body extent -1.5,-1.5 1.5,1.5, height 0.8
SOP65P490X109-8N [mm] "SOP, 0.65mm pitch; 8 pin,3.00mm W X 3.00mm L X 1.09mm H bodyI, PC Medium Density"
  rect 1.5x0.45 smd: 1(-2.2,0.975) 2(-2.2,0.325) 3(-2.2,-0.325) 4(-2.2,-0.975) 5(2.2,-0.975) 6(2.2,-0.325) 7(2.2,0.325) 8(2.2,0.975)
  silkscreen extent -2.82,-1.5 1.12,1.83, body extent -2.45,-1.55 2.45,1.55, height 1.09
SOT95P280X145-5N [mm] "SOT, 0.95mm pitch; 5 pin, 1.60mm W X 2.90mm L X 1.45mm H body, IPC Medium Density"
  rect 1.1x0.6 smd: 1(-1.3,0.95) 2(-1.3,0) 3(-1.3,-0.95) 4(1.3,-0.95) 5(1.3,0.95)
  silkscreen extent -1.73,-1.45 0.43,1.87, body extent -1.4,-1.5 1.4,1.5, height 1.45
SOT190P230X110-4N [mm] "SOT143, SOT, 1.90mm Pitch; 4 Pin, 1.30mm W X 2.90mm L X 1.10mm H body, IPC Medium Density"
  rect 1x1 smd: 1(-1.15,0.75)
  rect 1x0.6 smd: 2(-1.15,-0.95) 3(1.15,-0.95) 4(1.15,0.95)
  silkscreen extent -1.52,-1.45 0.33,1.88, body extent -1.25,-1.5 1.25,1.5, height 1.1
TEXAS_RGX0011A [mm] "TEXAS Case Style (R-VQFN-HR-N11), 0.50mm Pitch, 11-pin, 2.00mm W X 3.00mm L X 1.00mm H Body"
  oval 2.75x0.3 smd: 1(0,0.5) 2(0,0) 3(0,-0.5)
  oval 0.3x0.85 smd: 4(-0.75,-1.45) 5(-0.25,-1.45) 6(0.25,-1.45) 7(0.75,-1.45) 8(0.75,1.45) 9(0.25,1.45) 10(-0.25,1.45) 11(-0.75,1.45)
  silkscreen extent -2.07,0.38 -1.83,0.62, body extent -1,-1.5 1,1.5, height 1
TPS127 [mm] "1.27 x  1.27mm SMD Test Point Area"
  rect 1.27x1.27 smd paste-1.27: 1(0,0)
  silkscreen extent -0.94,-0.94 0.94,0.94

## Part data
 J5 J6 J7: library part AMPHENOL_919-383J-51A, Manufacturer=AMPHENOL, Manufacturer Part Number=919-383J-51A, Author="CERN DEM BC", ComponentHeight=6mm, Component Type=Standard, CreateDate=31.01.2019, Family=MCX, HelpURL=\\cern.ch\dfs\Applications\Altium\Datasheets\AMPHENOL_919-383J-51A.pdf, LatestRevisionDate=31.01.2019, Mounted=Yes, Part Description="50 Ohm, RF Connector, MCX Right Angle PCB Receptacle Jack", Part Number=AMPHENOL_919-383J-51A, Pin Count=5, PressFit=No, Sense=No, SMD=No, Socket=No, Status=None
B1 B2: library part PLATED_HOLE2.7_PAD5.0, "Single Terminal Socket", Author="CERN DEM JMW", Component Type="Standard (No BOM)", ComponentHeight=0mm, CreateDate=27.09.2011, Family="Plated Hole", HelpURL=Undefined, LatestRevisionDate=27.09.2011, Mounted=No, PackageDescription="Plated Through Hole: Hole Dia.=2.7mm Pad Dia.=5.0mm", Part Description="Plated Through Hole: Hole Dia.=2.7mm Pad Dia.=5.0mm", Part Number=PLATED_HOLE2.7_PAD5.0, Pin Count=1, Sense=No, SMD=No, Socket=No, Status=None
C2 C3 C4 C5 C6 C7 C8 C9 C10 C48 C67 C147 C153 C155 C157: library part CC0402_100NF_16V_10%_X5R, "Non-polarised capacitor", Case=0402, Manufacturer=GENERIC, Manufacturer1 ComponentHeight=0.55mm, Manufacturer1 Example=MURATA, Manufacturer1 Part Number=GRM155R61C104KA88D, Tolerance=±10%, Voltage=16V, Author="CERN DEM JLC", Component Type=Standard, CreateDate=10.12.2013, HelpURL=\\cern.ch\dfs\Applications\Altium\Datasheets\CC0402_X5R_MURATA_GRM.pdf, LatestRevisionDate=10.12.2013, Manufacturer Part Number=CC0402_100NF_16V_10%_X5R, Mounted=Yes, Part Description="SMD Multilayer Chip Ceramic Capacitor", Part Number=CC0402_100NF_16V_10%_X5R, Pin Count=2, Sense=No, SMD=Yes, Socket=No, Status=None, TC=X5R
C63 C77 C160 C165: library part CC0402_1UF_16V_10%_X5R, "Non-polarised capacitor", Case=0402, Manufacturer=GENERIC, Manufacturer1 ComponentHeight=0.55mm, Manufacturer1 Example=TDK, Manufacturer1 Part Number=C1005X5R1C105KT, Tolerance=±10%, Voltage=16V, Author="CERN DEM JLC", Component Type=Standard, CreateDate=2012-10-25, HelpURL=\\cern.ch\dfs\Applications\Altium\Datasheets\CC0402_X5R_TDK_C.pdf, LatestRevisionDate=2012-10-25, Manufacturer Part Number=CC0402_1UF_16V_10%_X5R, Mounted=Yes, Part Description="SMD Multilayer Chip Ceramic Capacitor", Part Number=CC0402_1UF_16V_10%_X5R, Pin Count=2, Sense=No, SMD=Yes, Socket=No, Status=Preferred, TC=X5R
C64 C70 C117 C119 C120 C148 C149 C150 C152 C154 C158 C183: library part CC0805_22UF_16V_10%_X5R, "Non-polarised capacitor", Case=0805, Manufacturer=GENERIC, Manufacturer1 ComponentHeight=1.35mm, Manufacturer1 Example=TDK, Manufacturer1 Part Number=C2012X5R1C226KT, Tolerance=±10%, Voltage=16V, Author="CERN DEM JLC", Component Type=Standard, CreateDate=25.10.2012, HelpURL=\\cern.ch\dfs\Applications\Altium\Datasheets\CC0805_X5R_TDK_C.pdf, LatestRevisionDate=25.10.2012, Manufacturer Part Number=CC0805_22UF_16V_10%_X5R, Mounted=Yes, Part Description="SMD Multilayer Chip Ceramic Capacitor", Part Number=CC0805_22UF_16V_10%_X5R, Pin Count=2, Sense=No, SMD=Yes, Socket=No, Status=Preferred, TC=X5R
C73 C75 C78 C125 C126 C166: library part CC1210_47UF_10V_20%_X5R, "Non-polarised capacitor", Case=1210, Manufacturer=GENERIC, Manufacturer1 ComponentHeight=2.7mm, Manufacturer1 Example="TAIYO YUDEN", Manufacturer1 Part Number=LMK325BJ476MM-T, Tolerance=±20%, Voltage=10V, Author="CERN DEM JLC", Component Type=Standard, CreateDate=04.05.2011, HelpURL=\\cern.ch\dfs\Applications\Altium\Datasheets\CC1210_X5R_TAIYO-YUDEN_HIGH-VALUE.pdf, LatestRevisionDate=04.05.2011, Manufacturer Part Number=CC1210_47UF_10V_20%_X5R, Mounted=Yes, Part Description="SMD Multilayer Chip Ceramic Capacitor", Part Number=CC1210_47UF_10V_20%_X5R, Pin Count=2, Sense=No, SMD=Yes, Socket=No, Status=None, TC=X5R
C74 C127 C146 C151 C156: library part CTE3528-21_22UF_10V_10%_LESR0700, "Polarised capacitor", Case=B, Manufacturer=GENERIC, Manufacturer1 ComponentHeight=2.1mm, Manufacturer1 Example=AVX, Manufacturer1 Part Number=TPSB226K010R0700, Tolerance=±10%, Voltage=10V, Author="CERN DEM JLC", Component Type=Standard, CreateDate=05.05.2008, HelpURL=\\cern.ch\dfs\Applications\Altium\Datasheets\CTE-LESR_AVX_TPS.pdf, LatestRevisionDate=20.01.2009, Manufacturer Part Number=CTE3528-21_22UF_10V_10%_LESR0700, Mounted=Yes, Part Description="Low ESR 0R7 Solid Tantalum Chip Capacitor", Part Number=CTE3528-21_22UF_10V_10%_LESR0700, Pin Count=2, Sense=No, SMD=Yes, Socket=No, Status=Preferred
C144 C145: library part CC0805_NO-VALUE, "Non-polarised capacitor", Case=0805, Manufacturer1 ComponentHeight=1.35mm, Author="CERN DEM JLC", Component Type=Standard, CreateDate=10.12.2008, HelpURL=Undefined, LatestRevisionDate=11.09.2013, Manufacturer=Undefined, Manufacturer Part Number=CC0805_NO-VALUE, Mounted=No, Part Description="Reserved Footprint For 0805(2012) Chip Ceramic Capacitor", Part Number=CC0805_NO-VALUE, Pin Count=2, Sense=No, SMD=Yes, Socket=No, Status=None
CLIP4 CLIP30: library part SHIELD_CLIP, "Surface Mount Clip for PCB Screening Covers", Manufacturer=HARWIN, Author="CERN DEM JLC", ComponentHeight=3.5mm, Component Type=Standard, CreateDate=2013-06-25, HelpURL=\\cern.ch\dfs\Applications\Altium\Datasheets\CLIP_HOLLAND-SHIELDING_LC.pdf, LatestRevisionDate=2013-06-25, Manufacturer Part Number=S1411-46R, Mounted=Yes, PackageDescription="Surface Mount Clip for PCB Screening Covers, 1500 Serie", Part Description="Surface Mount Clip for PCB Screening Covers, 1500 Serie", Part Number=S1411-46R, Pin Count=1, PressFit=No, SMD=Yes, Socket=No, Status=None, Table="Metal Screening Box"
D1: "Ultra Low Capacitance Double Rail-to-Rail ESD Protection Diode", Case=SOT143B, Manufacturer="NXP SEMICONDUCTORS", Voltage=5.5V, Author="CERN DEM JLC", Bonding=No, Component Type=Standard, ComponentHeight=1.1mm, CreateDate=22.03.2011, Device=PRTR5V0U2X, HelpURL=\\cern.ch\dfs\Applications\Altium\Datasheets\PRTR5V0U2X.pdf, LatestRevisionDate=22.03.2011, Manufacturer Part Number=PRTR5V0U2X, Mounted=Yes, PackageDescription="SOT143B, SOT, 1.90mm Pitch; 4 Pin, 1.30mm W X 2.90mm L X 1.10mm H body, IPC Medium Density", Part Description="Ultra Low Capacitance (1pF) Double Rail-to-Rail ESD Protection Diode (8kV)", Part Number=PRTR5V0U2X, Pin Count=4, PressFit=No, Sense=No, SMD=Yes, Socket=No
FTG2 FTG4: library part FIDUCIAL_TARGET_S100-200, "Fiducial Target", Author="CERN DEM JLC", ComponentHeight=0mm, Component Type="Standard (No BOM)", CreateDate=09.02.2010, Family=Fiducial, HelpURL=Undefined, LatestRevisionDate=04.04.2012, Mounted=No, PackageDescription="Square Fiducial Target, Top Layer, 1.0mm, Top Solder 2.0mm, Keepout =2.0mm", Part Description="Square Fiducial Target, Top Layer, 1.0mm, Top Solder 2.0mm, Keepout =2.0mm", Part Number=FIDUCIAL_TARGET_S100-200, Pin Count=1, Sense=No, SMD=Yes, Socket=No, Status=None
FTG3: library part FIDUCIAL_TARGET_S200-400, "Fiducial Target", Author="CERN DEM JLC", ComponentHeight=0mm, Component Type="Standard (No BOM)", CreateDate=02.06.2008, Family=Fiducial, HelpURL=Undefined, LatestRevisionDate=04.04.2012, Mounted=No, PackageDescription="Square Fiducial Target, Top Layer, 2.0mm, Top Solder 4.0mm, Keepout =4.0mm", Part Description="Square Fiducial Target, Top Layer, 2.0mm, Top Solder 4.0mm, Keepout =4.0mm", Part Number=FIDUCIAL_TARGET_S200-400, Pin Count=1, Sense=No, SMD=Yes, Socket=No, Status=None
IC1 IC6: "4-Channel Half-Duplex M-LVDS Line Transceiver", Case=QFN48, Manufacturer="TEXAS INSTRUMENTS", Author="CERN DEM JLC", Bonding=No, ComponentHeight=1mm, Component Type=Standard, CreateDate=17.03.2011, Device=SN65MLVD040RGZT, HelpURL=\\cern.ch\dfs\Applications\Altium\Datasheets\SN65MLVD040RGZT.pdf, LatestRevisionDate=17.03.2011, Manufacturer Part Number=SN65MLVD040RGZT, Mounted=Yes, PackageDescription="QFN, 0.50mm Pitch, Square; 48 Pin, 7.00mm L X 7.00mm W X 1mm H body (W/Thermal Tab 4.2mm X 4.2mm), IPC Medium Density", Part Description="4-Channel Half-Duplex M-LVDS Line Transceiver", Part Number=SN65MLVD040RGZT, Pin Count=49, PressFit=No, Sense=No, SMD=Yes, Socket=No
IC7 IC11: "3A, 0.8 to 3.6V Adjustable Low-Dropout Linear Regulator with Programmable Soft-Start", Case=QFN20, Manufacturer="TEXAS INSTRUMENTS", Author="CERN DEM JLC", Bonding=No, ComponentHeight=1mm, Component Type=Standard, CreateDate=07.03.2013, Device=TPS74901RGWT, HelpURL=\\cern.ch\dfs\Applications\Altium\Datasheets\TPS74901RGWT.pdf, LatestRevisionDate=07.03.2013, Manufacturer Part Number=TPS74901RGWT, Mounted=Yes, PackageDescription="QFN, 0.65mm pitch,square; 20 pin, 5mm X 5mm X 1mm H body (w/thermal tab 3.25 X 3.25mm),  IPC Medium Density", Part Description="0.8V to 3.6V, 3.0A Low Dropout Linear Regulator with Programmable Soft-Start", Part Number=TPS74901RGWT, Pin Count=21, PressFit=No, Sense=No, SMD=Yes, Socket=No
IC8: "1.7V-5.5V, 2K I2C Serial EEPROM With EUI-48 Node Identity", Case=SOT23-5, Manufacturer="MICROCHIP TECHNOLOGY", Author="CERN DEM MR", Bonding=No, ComponentHeight=1.45mm, Component Type=Standard, CreateDate=31.03.2016, Device=24AA02E48T-I/OT, HelpURL=\\cern.ch\dfs\Applications\Altium\Datasheets\24AA02E48T-I-OT.pdf, LatestRevisionDate=31.03.2016, Manufacturer Part Number=24AA02E48T-I/OT, Mounted=Yes, PackageDescription="SOT, 0.95mm pitch; 5 pin, 1.60mm W X 2.90mm L X 1.45mm H body, IPC Medium Density", Part Description="1.7V-5.5V, 2K I2C Serial EEPROM With EUI-48 Node Identity", Part Number=24AA02E48T-I/OT, Pin Count=5, PressFit=No, Sense=No, SMD=Yes, Socket=No
IC12: "Digital Temperature Sensor and Thermal Watchdog with Two-Wire Interface", Case=SSOP8, Manufacturer="TEXAS INSTRUMENTS", Author="CERN DEM JLC", Bonding=No, ComponentHeight=1.09mm, Component Type=Standard, CreateDate=15.10.2012, Device=LM75AIMM/NOPB, HelpURL=\\cern.ch\dfs\Applications\Altium\Datasheets\LM75AIMM-NOPB.pdf, LatestRevisionDate=15.10.2012, Manufacturer Part Number=LM75AIMM/NOPB, Mounted=Yes, PackageDescription="SOP, 0.65mm pitch; 8 pin,3.00mm W X 3.00mm L X 1.09mm H bodyI, PC Medium Density", Part Description="-25° to +100°C ±2°C Digital Temperature Sensor and Thermal Watchdog with Two-Wire Interface", Part Number=LM75AIMM/NOPB, Pin Count=8, PressFit=No, Sense=No, SMD=Yes, Socket=No
IC15: library part PM_LTM4622, "Dual Ultrathin 2A or Single 4A, 3.6V to 20V, 1.5V to 12V   Step-Down DC/DC μModule Regulator", Case=LGA25, Manufacturer="LINEAR TECHNOLOGY", Author=GK, Bonding=No, Component Type=Standard, ComponentHeight=2.92mm, CreateDate=06.05.2010, Device=LTM4622AEV#PBF, HelpURL=\\cern.ch\dfs\Applications\Altium\Datasheets\LTM4619EV#PBF.pdf, LatestRevisionDate=07.12.2011, Manufacturer Part Number=LTM4622AEV#PBF, Mounted=Yes, PackageDescription="LGA, 25-Leads, Body 6.25x6.25mmx1.90mm, Pitch 1.27mm", Part Description="Dual Ultrathin 2A or Single 4A, 3.6V to 20V, 1.5V to 12V   Step-Down DC/DC μModule Regulator", Part Number=LTM4622AEV#PBF, Pin Count=25, PressFit=No, Sense=No, SMD=Yes, Socket=No
IC16 IC18: "20V, 500mA, Ultralow Noise, Ultrahigh PSRR Linear Regulator", Case=SON10, Manufacturer="LINEAR TECHNOLOGY", Author="CERN DEM JLC", Bonding=No, Component Type=Standard, ComponentHeight=0.8mm, CreateDate=07.12.2016, Device=LT3045EDD#PBF, HelpURL=\\cern.ch\dfs\Applications\Altium\Datasheets\LT3045EDD#PBF.pdf, LatestRevisionDate=07.12.2016, Manufacturer Part Number=LT3045EDD#PBF, Mounted=Yes, PackageDescription="SON, 0.50mm Pitch, 10-pin, 3.00mm W  X 3.00mm L X 0.80mm Height, (w/thermal tab 1.75 X 2.48 mm), IPC Medium Density", Part Description="20V, 500mA, Ultralow Noise, Ultrahigh PSRR Linear Regulator", Part Number=LT3045EDD#PBF, Pin Count=11, PressFit=No, Sense=No, SMD=Yes, Socket=No
IC19: "3V-17V 2A Step-Down Converter, High Accuracy, With DCS-Control", Case=QFN14, Manufacturer="TEXAS INSTRUMENTS", Author="CERN DEM MR", Bonding=No, Component Type=Standard, ComponentHeight=1mm, CreateDate=08.02.2019, Device=TPS62148RGX, HelpURL=\\cern.ch\dfs\Applications\Altium\Datasheets\TPS62148RGX.pdf, LatestRevisionDate=08.02.2019, Manufacturer Part Number=TPS62148RGX, Mounted=Yes, PackageDescription="TEXAS Case Style (R-VQFN-HR-N11), 0.50mm Pitch, 11-pin, 2.00mm W X 3.00mm L X 1.00mm H Body", Part Description="3V-17V 2A Step-Down Converter, High Accuracy, With DCS-Control", Part Number=TPS62148RGX, Pin Count=11, PressFit=No, Sense=No, SMD=Yes, Socket=No
J1: library part 3M_N2530-6002RB, "Connector 30 Male", Manufacturer=3M, Manufacturer Part Number=N2530-6002RB, Author="CERN DEM JLC", ComponentHeight=10.03mm, Component Type=Standard, CreateDate=11.02.2009, Family="Header 30", HelpURL=\\cern.ch\dfs\Applications\Altium\Datasheets\3M_N2530-6002RB.pdf, LatestRevisionDate=11.08.2009, Mounted=Yes, Part Description="30 Contacts - Straight .100'' x .100'' Low Profile Four-Wall Header, 2500 Series", Part Number=3M_N2530-6002RB, Pin Count=30, PressFit=No, Sense=No, SMD=No, Socket=No, Status=None
J15 J16 J17 J18 J19: library part CON_SMA_DELOCK_65848, "50 Ohm Through Hole SMA Right Angle PCB Jack", Manufacturer=DELOCK, Manufacturer Part Number="5848 (4043619658480)", Part Number=DELOCK_65848, Author=GK, Component Type=Standard, ComponentHeight=12.5, CreateDate=13.05.2019, Family=SMA, HelpURL=\\cern.ch\dfs\Applications\Altium\Datasheets\AMPHENOL_132203-16.pdf, LatestRevisionDate=13.05.2019, Mounted=Yes, Part Description="50 Ohm Through Hole SMA Right Angle PCB Jack", Pin Count=5, PressFit=No, Sense=No, SMD=No, Socket=No, Status=None
L2 L4 L5 L15: library part IND_1.5UH_20%_TDK_SPM6530, "Inductor With Core", Manufacturer=TDK, Manufacturer Part Number=SPM6530T-1R5M100, Power=11A, Resistance=0.0097R, Tolerance=±20%, Author="CERN DEM MR", ComponentHeight=3mm, Component Type=Standard, CreateDate=08.11.2016, HelpURL=\\cern.ch\dfs\Applications\Altium\Datasheets\IND_TDK_SPM6530.pdf, LatestRevisionDate=08.11.2016, Mounted=Yes, Part Description="SMD Inductor for Power Circuits (Wound Metal), SPM Series", Part Number=IND_1.5UH_20%_TDK_SPM6530, Pin Count=2, Sense=No, SMD=Yes, Socket=No, Status=None
LD3 LD4 LD9 LD10 LD11 LD12: library part LED_0603_Green, "Green 0603", Manufacturer=KINGBRIGHT, Manufacturer Part Number=KPH-1608CGCK, Part Number=LED_KINGBRIGHT_KPH-1608CGCK, Author="CERN DEM JLC", Bonding=No, Color=Green, ComponentHeight=0.65mm, Component Type=Standard, CreateDate=03.07.2017, HelpURL=\\cern.ch\dfs\Applications\Altium\Datasheets\LED_KINGBRIGHT_KPH-1608CGCK.pdf, LatestRevisionDate=03.07.2017, Mounted=Yes, PackageDescription="SMT Green LED, Case 0603, Body L 1.6 x W 0.8mm H 0.65mm", Part Description="SMD Green LED, Case 1.6mmX0.8mm(0603), 0.65mm Thickness", Pin Count=2, PressFit=No, Sense=No, SMD=Yes, Socket=No
LD7: library part LED_DIALIGHT_571-0112F, "2x LED  Botom Green, Top Red", Manufacturer=DIALIGHT, Manufacturer Part Number=571-0112F, Author="CERN DEM JLC", Bonding=No, Color=Red/Green, Component Type=Standard, ComponentHeight=8.6mm, CreateDate=09.11.2009, HelpURL=\\cern.ch\dfs\Applications\Altium\Datasheets\LED_DIALIGHT_571-0112F.pdf, LatestRevisionDate=17.03.2010, Mounted=Yes, PackageDescription="2x 2mm LED (Top: Red, Bot: Green) PCB Edge Mounting (Without positioning pins) DIALIGHT 571 Serie", Part Description="Dual 2mm  LEDs, Red Top,Green Bot, CBI® Circuit Board Indicator (Without positioning pins)", Part Number=LED_DIALIGHT_571-0112F, Pin Count=4, PressFit=No, Sense=No, SMD=No, Socket=No
R7 R9 R11 R13 R16 R21 R24 R35: library part R0402_100R_1%_0.1W_100PPM, "Resistor - 1%", Case=0402, Manufacturer=GENERIC, Manufacturer1 ComponentHeight=0.4mm, Manufacturer1 Example=PANASONIC, Manufacturer1 Part Number=ERJ2RKF1000X, Manufacturer Part Number=R0402_100R_1%_0.1W_100PPM_50V, Power=0.1W, Tolerance=±1%, Voltage=50V, Author="CERN DEM JLC", Component Type=Standard, CreateDate=12.12.2013, HelpURL=\\cern.ch\dfs\Applications\Altium\Datasheets\R0402_PANASONIC_ERJ2RK.pdf, LatestRevisionDate=03.03.2015, Mounted=Yes, Part Description="General Purpose Thick Film Chip Resistor", Part Number=R0402_100R_1%_0.1W_100PPM, Pin Count=2, Sense=No, SMD=Yes, Socket=No, Status="Not recommended", TC=±100ppm/°C
R23 R118: library part R0603_4K7_1%_0.1W_100PPM, "Resistor - 1%", Case=0603, Manufacturer=GENERIC, Manufacturer1 ComponentHeight=0.55mm, Manufacturer1 Example="NIC COMPONENT", Manufacturer1 Part Number=NRC06F4701TRF, Power=0.1W, Tolerance=±1%, Author="CERN DEM JLC", Component Type=Standard, CreateDate=03.12.2007, HelpURL=\\cern.ch\dfs\Applications\Altium\Datasheets\R0603_NIC_NRC.pdf, LatestRevisionDate=13.03.2008, Manufacturer Part Number=R0603_4K7_1%_0.1W_100PPM, Mounted=Yes, Part Description="General Purpose Thick Film Chip Resistor", Part Number=R0603_4K7_1%_0.1W_100PPM, Pin Count=2, PressFit=No, Sense=No, SMD=Yes, Socket=No, Status=Preferred, TC=±100ppm/°C
R33 R120 R121 R122: library part R0402_10K_1%_0.0625W_100PPM, "Resistor - 1%", Case=0402, Manufacturer=GENERIC, Manufacturer1 ComponentHeight=0.4mm, Manufacturer1 Example="YAGEO PHYCOMP", Manufacturer1 Part Number=232270671003L, Power=0.0625W, Tolerance=±1%, Author="CERN DEM JLC", Component Type=Standard, CreateDate=03.12.2007, HelpURL=\\cern.ch\dfs\Applications\Altium\Datasheets\R0402_Phycomp_RC0402.pdf, LatestRevisionDate=17.10.2012, Manufacturer Part Number=R0402_10K_1%_0.0625W_100PPM, Mounted=Yes, Part Description="General Purpose Thick Film Chip Resistor", Part Number=R0402_10K_1%_0.0625W_100PPM, Pin Count=2, Sense=No, SMD=Yes, Socket=No, TC=±100ppm/°C
  R33: Status="Not recommended"
  R120 R121 R122: PressFit=No, Status="Not Recommended"
R53 R109: library part R0603_5K6_1%_0.1W_100PPM, "Resistor - 1%", Case=0603, Manufacturer=GENERIC, Manufacturer1 ComponentHeight=0.55mm, Manufacturer1 Example="NIC COMPONENT", Manufacturer1 Part Number=NRC06F5601TRF, Power=0.1W, Tolerance=±1%, Author="CERN DEM JLC", Component Type=Standard, CreateDate=03.12.2007, HelpURL=\\cern.ch\dfs\Applications\Altium\Datasheets\R0603_NIC_NRC.pdf, LatestRevisionDate=13.03.2008, Manufacturer Part Number=R0603_5K6_1%_0.1W_100PPM, Mounted=Yes, Part Description="General Purpose Thick Film Chip Resistor", Part Number=R0603_5K6_1%_0.1W_100PPM, Pin Count=2, Sense=No, SMD=Yes, Socket=No, Status=Preferred, TC=±100ppm/°C
R55 R82: library part R0603_24K_1%_0.1W_100PPM, "Resistor - 1%", Case=0603, Manufacturer=GENERIC, Manufacturer1 ComponentHeight=0.55mm, Manufacturer1 Example="NIC COMPONENT", Manufacturer1 Part Number=NRC06F2402TRF, Power=0.1W, Tolerance=±1%, Author="CERN DEM JLC", Component Type=Standard, CreateDate=03.12.2007, HelpURL=\\cern.ch\dfs\Applications\Altium\Datasheets\R0603_NIC_NRC.pdf, LatestRevisionDate=13.03.2008, Manufacturer Part Number=R0603_24K_1%_0.1W_100PPM, Mounted=Yes, Part Description="General Purpose Thick Film Chip Resistor", Part Number=R0603_24K_1%_0.1W_100PPM, Pin Count=2, PressFit=No, Sense=No, SMD=Yes, Socket=No, Status=Preferred, TC=±100ppm/°C
R80 R119: library part R0603_1K5_1%_0.1W_100PPM, "Resistor - 1%", Case=0603, Manufacturer=GENERIC, Manufacturer1 ComponentHeight=0.55mm, Manufacturer1 Example="NIC COMPONENT", Manufacturer1 Part Number=NRC06F1501TRF, Power=0.1W, Tolerance=±1%, Author="CERN DEM JLC", Component Type=Standard, CreateDate=03.12.2007, HelpURL=\\cern.ch\dfs\Applications\Altium\Datasheets\R0603_NIC_NRC.pdf, LatestRevisionDate=13.03.2008, Manufacturer Part Number=R0603_1K5_1%_0.1W_100PPM, Mounted=Yes, Part Description="General Purpose Thick Film Chip Resistor", Part Number=R0603_1K5_1%_0.1W_100PPM, Pin Count=2, PressFit=No, Sense=No, SMD=Yes, Socket=No, Status=Preferred, TC=±100ppm/°C
R96 R137: library part R0603_0R_JUMPER, "Resistor", Case=0603, Manufacturer=GENERIC, Manufacturer1 ComponentHeight=0.55mm, Manufacturer1 Example="NIC COMPONENT", Manufacturer1 Part Number=NRC06Z0, Author="CERN DEM JLC", Component Type=Standard, CreateDate=03.12.2007, HelpURL=\\cern.ch\dfs\Applications\Altium\Datasheets\R0603_NIC_NRC.pdf, LatestRevisionDate=13.03.2008, Manufacturer Part Number=R0603_0R_JUMPER, Mounted=Yes, Part Description="1A (0.05R Max DC Resistance) Zero Ohm Jumper", Part Number=R0603_0R_JUMPER, Pin Count=2, PressFit=No, Sense=No, SMD=Yes, Socket=No, Status=Preferred
R104 R105: library part R0402_100K_1%_0.0625W_100PPM, "Resistor - 1%", Case=0402, Manufacturer=GENERIC, Manufacturer1 ComponentHeight=0.4mm, Manufacturer1 Example="YAGEO PHYCOMP", Manufacturer1 Part Number=232270671004L, Power=0.0625W, Tolerance=±1%, Author="CERN DEM JLC", Component Type=Standard, CreateDate=03.12.2007, HelpURL=\\cern.ch\dfs\Applications\Altium\Datasheets\R0402_Phycomp_RC0402.pdf, LatestRevisionDate=17.10.2012, Manufacturer Part Number=R0402_100K_1%_0.0625W_100PPM, Mounted=Yes, Part Description="General Purpose Thick Film Chip Resistor", Part Number=R0402_100K_1%_0.0625W_100PPM, Pin Count=2, PressFit=No, Sense=No, SMD=Yes, Socket=No, Status="Not Recommended", TC=±100ppm/°C
R106: library part R0603_1K3_1%_0.1W_100PPM, "Resistor - 1%", Case=0603, Manufacturer=GENERIC, Manufacturer1 ComponentHeight=0.55mm, Manufacturer1 Example="NIC COMPONENT", Manufacturer1 Part Number=NRC06F1301TRF, Power=0.1W, Tolerance=±1%, Author="CERN DEM JLC", Component Type=Standard, CreateDate=03.12.2007, HelpURL=\\cern.ch\dfs\Applications\Altium\Datasheets\R0603_NIC_NRC.pdf, LatestRevisionDate=13.03.2008, Manufacturer Part Number=R0603_1K3_1%_0.1W_100PPM, Mounted=Yes, Part Description="General Purpose Thick Film Chip Resistor", Part Number=R0603_1K3_1%_0.1W_100PPM, Pin Count=2, PressFit=No, Sense=No, SMD=Yes, Socket=No, Status=Preferred, TC=±100ppm/°C
R107: library part R0402_150R_1%_0.0625W_100PPM, "Resistor - 1%", Case=0402, Manufacturer=GENERIC, Manufacturer1 ComponentHeight=0.4mm, Manufacturer1 Example="YAGEO PHYCOMP", Manufacturer1 Part Number=232270671501L, Power=0.0625W, Tolerance=±1%, Author="CERN DEM JLC", Component Type=Standard, CreateDate=03.12.2007, HelpURL=\\cern.ch\dfs\Applications\Altium\Datasheets\R0402_Phycomp_RC0402.pdf, LatestRevisionDate=17.10.2012, Manufacturer Part Number=R0402_150R_1%_0.0625W_100PPM, Mounted=Yes, Part Description="General Purpose Thick Film Chip Resistor", Part Number=R0402_150R_1%_0.0625W_100PPM, Pin Count=2, PressFit=No, Sense=No, SMD=Yes, Socket=No, Status="Not Recommended", TC=±100ppm/°C
R108: library part R0603_5k1_1%_0.1W_100PPM, "Resistor - 1%", Case=0603, Manufacturer=GENERIC, Manufacturer1 ComponentHeight=0.55mm, Manufacturer1 Example="NIC COMPONENT", Manufacturer1 Part Number=NRC06F5101TRF, Manufacturer Part Number=R0603_5K1_1%_0.1W_100PPM, Power=0.1W, Tolerance=±1%, Author="CERN DEM JLC", Component Type=Standard, CreateDate=03.12.2007, HelpURL=\\cern.ch\dfs\Applications\Altium\Datasheets\R0603_NIC_NRC.pdf, LatestRevisionDate=13.03.2008, Mounted=Yes, Part Description="General Purpose Thick Film Chip Resistor", Part Number=R0603_5K1_1%_0.1W_100PPM, Pin Count=2, PressFit=No, Sense=No, SMD=Yes, Socket=No, Status=Preferred, TC=±100ppm/°C
R110: library part R0402_18K_1%_0.0625W_100PPM, "Resistor - 1%", Case=0402, Manufacturer=GENERIC, Manufacturer1 ComponentHeight=0.4mm, Manufacturer1 Example="YAGEO PHYCOMP", Manufacturer1 Part Number=232270671803L, Power=0.0625W, Tolerance=±1%, Author="CERN DEM JLC", Component Type=Standard, CreateDate=03.12.2007, HelpURL=\\cern.ch\dfs\Applications\Altium\Datasheets\R0402_Phycomp_RC0402.pdf, LatestRevisionDate=17.10.2012, Manufacturer Part Number=R0402_18K_1%_0.0625W_100PPM, Mounted=Yes, Part Description="General Purpose Thick Film Chip Resistor", Part Number=R0402_18K_1%_0.0625W_100PPM, Pin Count=2, PressFit=No, Sense=No, SMD=Yes, Socket=No, Status="Not Recommended", TC=±100ppm/°C
R114 R133: library part R0402_68K_1%_0.0625W_100PPM, "Resistor - 1%", Case=0402, Manufacturer=GENERIC, Manufacturer1 ComponentHeight=0.4mm, Manufacturer1 Example="YAGEO PHYCOMP", Manufacturer1 Part Number=232270676803L, Power=0.0625W, Tolerance=±1%, Author="CERN DEM JLC", Component Type=Standard, CreateDate=03.12.2007, HelpURL=\\cern.ch\dfs\Applications\Altium\Datasheets\R0402_Phycomp_RC0402.pdf, LatestRevisionDate=17.10.2012, Manufacturer Part Number=R0402_68K_1%_0.0625W_100PPM, Mounted=Yes, Part Description="General Purpose Thick Film Chip Resistor", Part Number=R0402_68K_1%_0.0625W_100PPM, Pin Count=2, PressFit=No, Sense=No, SMD=Yes, Socket=No, Status="Not Recommended", TC=±100ppm/°C